# Altium PCB PCB1.PcbDoc (part 1 of 3)
Units mm, origin at the board's own origin, x right, y up, seen from the top; angles counter-clockwise.
Board outline 312.67 x 198.63 mm, 2 copper layers (Top Layer, Bottom Layer); 142 components, 324 nets, 969 pads, 386 vias.
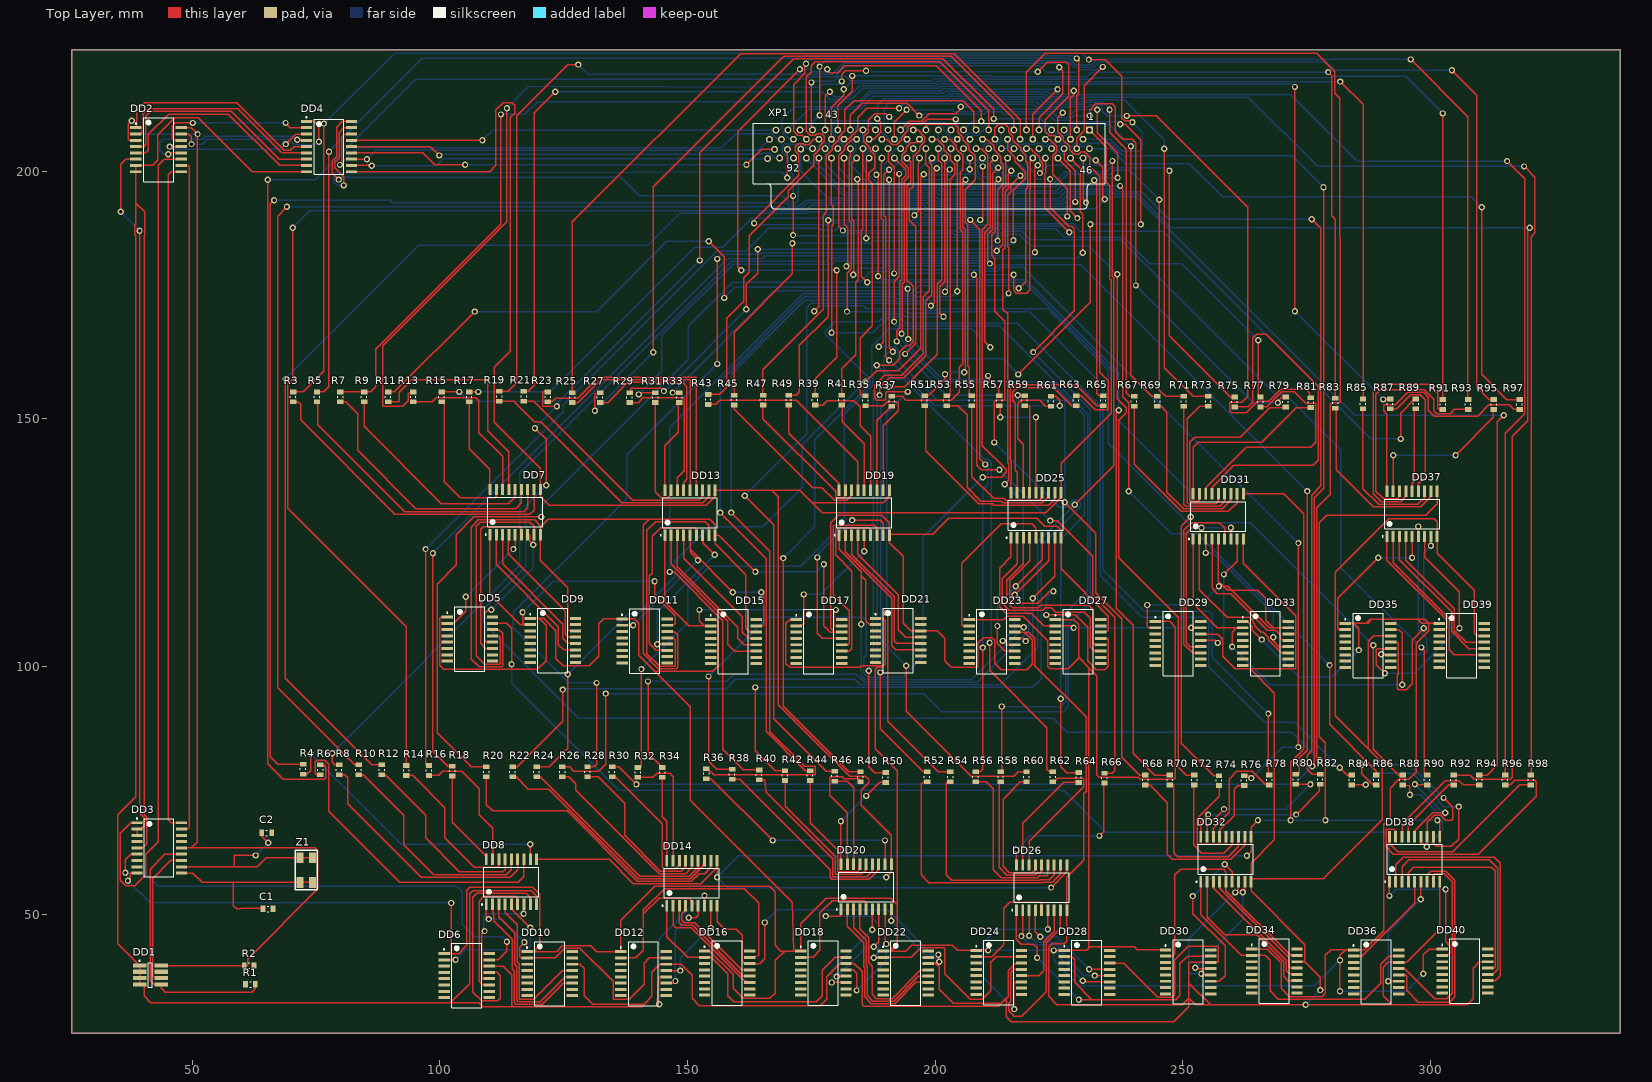
[diagram p0: Top Layer view]
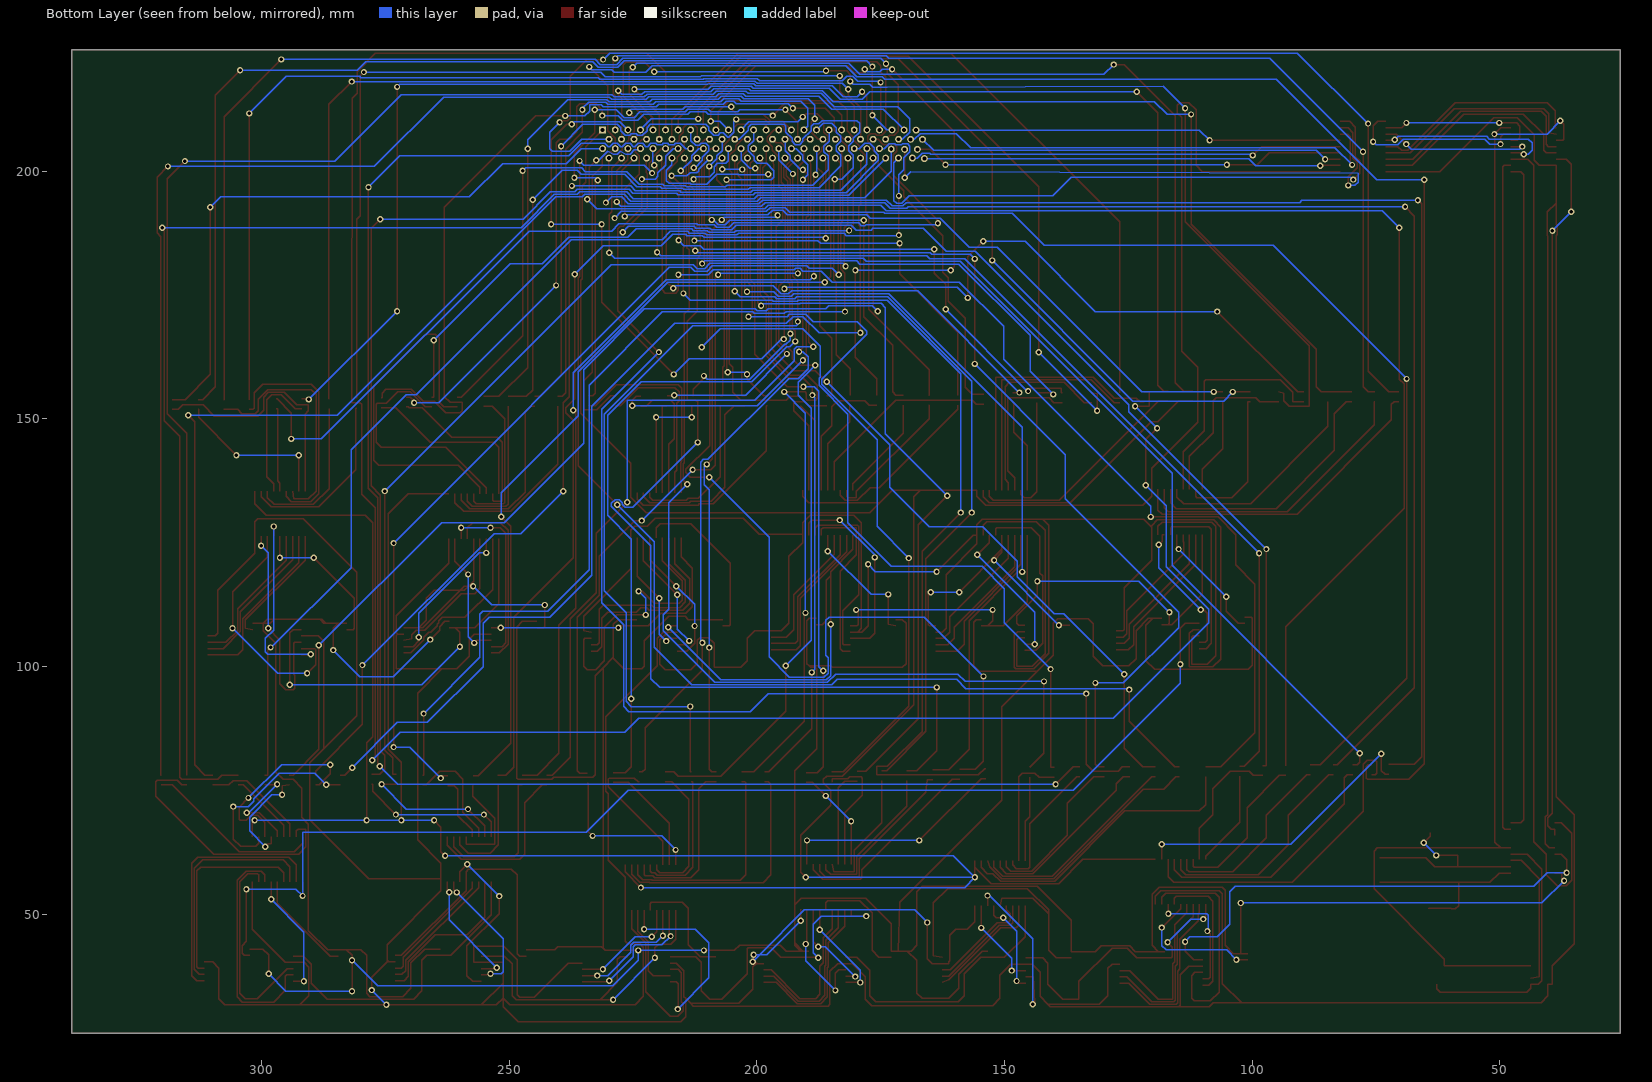
[diagram p1: Bottom Layer view, seen from below]

## Layer stack, top to bottom
Top Solder: solder mask 0.0102, Solder Resist, Dk 3.5
Top Layer: signal copper 0.0356
Dielectric 1: dielectric 0.32, FR-4, Dk 4.8
Bottom Layer: signal copper 0.0356
Bottom Solder: solder mask 0.0102, Solder Resist, Dk 3.5

## Board outline
25.654,25.908 25.654,224.536 338.328,224.536 338.328,25.908

## Design rules (kind name [scope] priority, off if disabled: settings)
Clearance [All] p1: gap=0.25
PolygonConnect [All] p1: connectstyle=Relief reliefconductorwidth=0.254 reliefentries=4 polygonreliefangle="90 Angle" airgapwidth=0.254
RoomDefinition Sheet1 [InComponentClass('Sheet1')] p1: confinementstyle=ConfineIn formatcopy=TRUE lockcomponents=FALSE outline 25.654,25.908 338.328,25.908 338.328,224.536 25.654,224.536
RoutingVias [All] p1: holewidth=0.711 width=1.27 viastyle="Through Hole" minholewidth=0.711 minwidth=1.27 maxholewidth=0.711 maxwidth=1.27
SolderMaskExpansion [All] p1: expansion=0.102
Width [All] p1: maxlimit=1 minlimit=0.254 preferedwidth=0.254
29 further rules are at their usual default settings.

## Components (designator, comment, footprint, x,y, rotation, side; value= is the part's Value field where it differs from the comment)
DD1 "24C512" 24C512 41.532,37.719 r0 top
DD2 "561KP2" 561KP2 43.18,204.343 r0 top
DD3 "PIC16F628" PIC16F628 43.31,63.373 r0 top
DD4 "TD62083" TD62083 77.597,204.978 r0 top
DD5 "561IR2" CD4015 106.042,105.537 r0 top
DD6 "561IR2" CD4015 105.413,37.592 r0 top
DD7 "TD62083" TD62083 115.186,131.191 r90 top
DD8 "TD62083" TD62083 114.43,56.515 r90 top
DD9 "561IR2" CD4015 122.806,105.283 r0 top
DD10 "561IR2" CD4015 122.177,37.973 r0 top
DD11 "561IR2" CD4015 141.348,105.156 r0 top
DD12 "561IR2" CD4015 141.1,37.973 r0 top
DD13 "TD62083" TD62083 150.492,131.064 r90 top
DD14 "TD62083" TD62083 150.879,56.261 r90 top
DD15 "561IR2" CD4015 159.255,105.029 r0 top
DD16 "561IR2" CD4015 157.991,38.1 r0 top
DD17 "561IR2" CD4015 176.527,105.029 r0 top
DD18 "561IR2" CD4015 177.422,38.1 r0 top
DD19 "TD62083" TD62083 185.671,131.064 r90 top
DD20 "TD62083" TD62083 186.058,55.499 r90 top
DD21 "561IR2" CD4015 192.529,105.283 r0 top
DD22 "561IR2" CD4015 194.059,38.1 r0 top
DD23 "561IR2" CD4015 211.452,105.029 r0 top
DD24 "561IR2" CD4015 212.855,38.227 r0 top
DD25 "TD62083" TD62083 220.342,130.556 r90 top
DD26 "TD62083" TD62083 221.491,55.372 r90 top
DD27 "561IR2" CD4015 228.851,105.029 r0 top
DD28 "561IR2" CD4015 230.635,38.227 r0 top
DD29 "561IR2" CD4015 249.044,104.648 r0 top
DD30 "561IR2" CD4015 251.082,38.354 r0 top
DD31 "TD62083" TD62083 257.172,130.302 r90 top
DD32 "TD62083" TD62083 258.702,61.087 r90 top
DD33 "561IR2" CD4015 266.697,104.648 r0 top
DD34 "561IR2" CD4015 268.481,38.481 r0 top
DD35 "561IR2" CD4015 287.398,104.267 r0 top
DD36 "561IR2" CD4015 289.055,38.354 r0 top
DD37 "TD62083" TD62083 296.288,130.81 r90 top
DD38 "TD62083" TD62083 296.802,61.087 r90 top
DD39 "561IR2" CD4015 306.321,104.267 r0 top
DD40 "561IR2" CD4015 306.962,38.481 r0 top
R1 "Resistor125" R_0805 61.725,35.814 r0 top
R2 "Resistor125" R_0805 61.471,39.624 r0 top
R3 "Resistor125" R_0805 70.355,154.448 r90 top
R4 "Resistor125" R_0805 72.393,79.264 r90 top
R5 "Resistor125" R_0805 75.181,154.448 r90 top
R6 "Resistor125" R_0805 75.838,79.137 r90 top
R7 "Resistor125" R_0805 79.88,154.448 r90 top
R8 "Resistor125" R_0805 79.632,79.137 r90 top
R9 "Resistor125" R_0805 84.706,154.448 r90 top
R10 "Resistor125" R_0805 83.569,79.137 r90 top
R11 "Resistor125" R_0805 89.532,154.448 r90 top
R12 "Resistor125" R_0805 88.268,79.137 r90 top
R13 "Resistor125" R_0805 94.612,154.448 r90 top
R14 "Resistor125" R_0805 93.221,79.01 r90 top
R15 "Resistor125" R_0805 100.327,154.448 r90 top
R16 "Resistor125" R_0805 97.793,79.01 r90 top
R17 "Resistor125" R_0805 105.915,154.448 r90 top
R18 "Resistor125" R_0805 102.492,78.883 r90 top
R19 "Resistor125" R_0805 112.011,154.559 r90 top
R20 "Resistor125" R_0805 109.366,78.74 r90 top
R21 "Resistor125" R_0805 116.964,154.559 r90 top
R22 "Resistor125" R_0805 114.684,78.74 r90 top
R23 "Resistor125" R_0805 121.79,154.432 r90 top
R24 "Resistor125" R_0805 119.51,78.74 r90 top
R25 "Resistor125" R_0805 126.743,154.305 r90 top
R26 "Resistor125" R_0805 124.717,78.74 r90 top
R27 "Resistor125" R_0805 132.331,154.305 r90 top
R28 "Resistor125" R_0805 129.797,78.74 r90 top
R29 "Resistor125" R_0805 138.3,154.305 r90 top
R30 "Resistor125" R_0805 134.75,78.74 r90 top
R31 "Resistor125" R_0805 143.507,154.305 r90 top
R32 "Resistor125" R_0805 139.957,78.613 r90 top
R33 "Resistor125" R_0805 148.333,154.305 r90 top
R34 "Resistor125" R_0805 144.91,78.613 r90 top
R35 "Resistor125" R_0805 185.925,153.67 r90 top
R36 "Resistor125" R_0805 153.816,78.359 r90 top
R37 "Resistor125" R_0805 191.259,153.543 r90 top
R38 "Resistor125" R_0805 159.007,78.232 r90 top
R39 "Resistor125" R_0805 175.765,153.797 r90 top
R40 "Resistor125" R_0805 164.468,78.105 r90 top
R41 "Resistor125" R_0805 181.099,153.797 r90 top
R42 "Resistor125" R_0805 169.675,77.978 r90 top
R43 "Resistor125" R_0805 154.175,153.924 r90 top
R44 "Resistor125" R_0805 174.755,77.978 r90 top
R45 "Resistor125" R_0805 159.398,153.797 r90 top
R46 "Resistor125" R_0805 179.708,77.851 r90 top
R47 "Resistor125" R_0805 165.24,153.797 r90 top
R48 "Resistor125" R_0805 184.915,77.724 r90 top
R49 "Resistor125" R_0805 170.431,153.797 r90 top
R50 "Resistor125" R_0805 189.995,77.597 r90 top
R51 "Resistor125" R_0805 197.863,153.67 r90 top
R52 "Resistor125" R_0805 198.377,77.724 r90 top
R53 "Resistor125" R_0805 202.308,153.67 r90 top
R54 "Resistor125" R_0805 203.076,77.724 r90 top
R55 "Resistor125" R_0805 207.388,153.67 r90 top
R56 "Resistor125" R_0805 208.156,77.724 r90 top
R57 "Resistor125" R_0805 212.976,153.67 r90 top
R58 "Resistor125" R_0805 213.236,77.724 r90 top
R59 "Resistor125" R_0805 218.056,153.67 r90 top
R60 "Resistor125" R_0805 218.443,77.724 r90 top
R61 "Resistor125" R_0805 223.39,153.543 r90 top
R62 "Resistor125" R_0805 223.777,77.724 r90 top
R63 "Resistor125" R_0805 228.47,153.67 r90 top
R64 "Resistor125" R_0805 228.984,77.597 r90 top
R65 "Resistor125" R_0805 233.931,153.67 r90 top
R66 "Resistor125" R_0805 234.191,77.47 r90 top
R67 "Resistor125" R_0805 240.154,153.543 r90 top
R68 "Resistor125" R_0805 242.446,77.089 r90 top
R69 "Resistor125" R_0805 244.853,153.543 r90 top
R70 "Resistor125" R_0805 247.399,77.089 r90 top
R71 "Resistor125" R_0805 250.187,153.543 r90 top
R72 "Resistor125" R_0805 252.352,77.089 r90 top
R73 "Resistor125" R_0805 255.14,153.543 r90 top
R74 "Resistor125" R_0805 257.305,76.962 r90 top
R75 "Resistor125" R_0805 260.474,153.416 r90 top
R76 "Resistor125" R_0805 262.385,76.962 r90 top
R77 "Resistor125" R_0805 265.681,153.416 r90 top
R78 "Resistor125" R_0805 267.465,77.089 r90 top
R79 "Resistor125" R_0805 270.761,153.416 r90 top
R80 "Resistor125" R_0805 272.799,77.216 r90 top
R81 "Resistor125" R_0805 275.841,153.289 r90 top
R82 "Resistor125" R_0805 277.752,77.216 r90 top
R83 "Resistor125" R_0805 280.81,153.162 r90 top
R84 "Resistor125" R_0805 284.118,77.089 r90 top
R85 "Resistor125" R_0805 286.382,153.035 r90 top
R86 "Resistor125" R_0805 289.055,77.089 r90 top
R87 "Resistor125" R_0805 291.843,153.035 r90 top
R88 "Resistor125" R_0805 294.389,77.089 r90 top
R89 "Resistor125" R_0805 297.05,153.035 r90 top
R90 "Resistor125" R_0805 299.342,77.089 r90 top
R91 "Resistor125" R_0805 302.511,152.908 r90 top
R92 "Resistor125" R_0805 304.676,77.089 r90 top
R93 "Resistor125" R_0805 307.591,152.908 r90 top
R94 "Resistor125" R_0805 309.883,77.089 r90 top
R95 "Resistor125" R_0805 312.798,152.908 r90 top
R96 "Resistor125" R_0805 315.09,77.089 r90 top
R97 "Resistor125" R_0805 318.005,152.908 r90 top
R98 "Resistor125" R_0805 320.297,77.089 r90 top
XP1 "Contact" CONNECTOR 199.898,203.962 r180 top
Z1 "Resonator" Z_SMD 71.758,56.388 r90 top
С1 "Capacitor" C_0805 65.281,51.054 r0 top
С2 "Capacitor" C_0805 65.027,66.421 r0 top

## Footprints (in the part's own frame and the unit in brackets; to place one, negate y for a bottom-side part, rotate by r counter-clockwise, add the part's x,y. Pads: shape width x height; smd on the part's side, far side on the other; paste and mask are expansions set on the pad)
24C512 [mm] "SOIC, 8-Leads, Body 4,90x3,90mm, Pitch 1,27mm, IPC Medium Density"
  rect 2.7x0.85 smd: 1(-2.175,1.905) 2(-2.175,0.635) 3(-2.175,-0.635) 4(-2.175,-1.905) 5(2.175,-1.905) 6(2.175,-0.635) 7(2.175,0.635) 8(2.175,1.905)
  silkscreen extent -2.3,-2.5 0.42,3, body extent -2,-2.5 2,2.5, height 1.75
561KP2 [mm] "SOIC, 16-Leads, Body 12,80x7,50mm, Pitch 1,27mm, IPC Medium Density"
  rect 2.3x0.6 smd: 1(-4.575,4.445) 2(-4.575,3.175) 3(-4.575,1.905) 4(-4.575,0.635) 5(-4.575,-0.635) 6(-4.575,-1.905) 7(-4.575,-3.175) 8(-4.575,-4.445) 9(4.575,-4.445) 10(4.575,-3.175) 11(4.575,-1.905) 12(4.575,-0.635) 13(4.575,0.635) 14(4.575,1.905) 15(4.575,3.175) 16(4.575,4.445)
  silkscreen extent -4.7,-6.5 3.02,6.5, body extent -3.8,-6.5 3.8,6.5, height 2.65
C_0805 [mm] "Chip Resistor, 2-Leads, Body 2,00x1,25mm, IPC Medium Density"
  rect 0.95x1.3 smd: 1(-1,0) 2(1,0)
  silkscreen extent -0.15,-0.55 0.15,0.55, body extent -1,-0.63 1,0.63, height 0.6
CD4015 [mm] "SOIC, 16-Leads, Body 12,80x7,50mm, Pitch 1,27mm, IPC Medium Density"
  rect 2.3x0.6 smd: 1(-4.575,4.445) 2(-4.575,3.175) 3(-4.575,1.905) 4(-4.575,0.635) 5(-4.575,-0.635) 6(-4.575,-1.905) 7(-4.575,-3.175) 8(-4.575,-4.445) 9(4.575,-4.445) 10(4.575,-3.175) 11(4.575,-1.905) 12(4.575,-0.635) 13(4.575,0.635) 14(4.575,1.905) 15(4.575,3.175) 16(4.575,4.445)
  silkscreen extent -4.7,-6.5 3.02,6.5, body extent -3.8,-6.5 3.8,6.5, height 2.65
CONNECTOR [mm]
  rect 1.4x1.4 hole 0.8: 1(-31.229,-4.405)
  round 1.4 hole 0.8: 2(-29.959,-2.5) 3(-28.689,-4.405) 4(-27.419,-2.5) 5(-26.149,-4.405) 6(-24.879,-2.5) 7(-23.609,-4.405) 8(-22.339,-2.5) 9(-21.069,-4.405) 10(-19.799,-2.5) 11(-18.529,-4.405) 12(-17.259,-2.5) 13(-15.989,-4.405) 14(-14.719,-2.5) 15(-13.449,-4.405) 16(-12.179,-2.5) 17(-10.909,-4.405) 18(-9.639,-2.5) 19(-8.369,-4.405) 20(-7.099,-2.5) 21(-5.829,-4.405) 22(-4.559,-2.5) 23(-3.289,-4.405) 24(-2.019,-2.5) 25(-0.749,-4.405) 26(0.521,-2.5) 27(1.791,-4.405) 28(3.061,-2.5) 29(4.331,-4.405) 30(5.601,-2.5) 31(6.871,-4.405) 32(8.141,-2.5) 33(9.411,-4.405) 34(10.681,-2.5) 35(11.951,-4.405) 36(13.221,-2.5) 37(14.491,-4.405) 38(15.761,-2.5) 39(17.031,-4.405) 40(18.301,-2.5) 41(19.571,-4.405) 42(20.841,-2.5) 43(22.111,-4.405) 44(23.381,-2.5) 45(24.651,-4.405) 46(25.921,-2.5) 47(27.191,-4.405) 47(27.191,-4.405) 49(-31.229,-0.595) 50(-29.959,1.31) 51(-28.689,-0.595) 52(-27.419,1.31) 53(-26.149,-0.595) 54(-24.879,1.31) 55(-23.609,-0.595) 56(-22.339,1.31) 57(-21.069,-0.595) 58(-19.799,1.31) 59(-18.529,-0.595) 60(-17.259,1.31) 61(-15.989,-0.595) 62(-14.719,1.31) 63(-13.449,-0.595) 64(-12.179,1.31) 65(-10.909,-0.595) 66(-9.639,1.31) 67(-8.369,-0.595) 68(-7.099,1.31) 69(-5.829,-0.595) 70(-4.559,1.31) 71(-3.289,-0.595) 72(-2.019,1.31) 73(-0.749,-0.595) 74(0.521,1.31) 75(1.791,-0.595) 76(3.061,1.31) 77(4.331,-0.595) 78(5.601,1.31) 79(6.871,-0.595) 80(8.141,1.31) 81(9.411,-0.595) 82(10.681,1.31) 83(11.951,-0.595) 84(13.221,1.31) 85(14.491,-0.595) 86(15.761,1.31) 87(17.031,-0.595) 88(18.301,1.31) 89(19.571,-0.595) 90(20.841,1.31) 91(22.111,-0.595) 92(23.381,1.31) 93(24.651,-0.595) 94(25.921,1.31) 95(27.041,-0.5) 96(28.541,-2.5) 97(29.642,-4.369) 98(28.499,1.295) 99(29.743,-0.457) 100(30.963,-2.489) 101(32.055,-4.343) 102(31.293,1.295) 103(32.309,-0.457) 104(33.35,-2.489) 105(33.731,1.397)
  silkscreen extent -34.39,-5.7 36.61,11.53
PIC16F628 [mm] "SOIC, 18-Leads, Body 11,58x7,50mm, Pitch 1,27mm, IPC Medium Density"
  rect 2.2x0.6 smd: 1(-4.475,5.08) 2(-4.475,3.81) 3(-4.475,2.54) 4(-4.475,1.27) 5(-4.475,0) 6(-4.475,-1.27) 7(-4.475,-2.54) 8(-4.475,-3.81) 9(-4.475,-5.08) 10(4.475,-5.08) 11(4.475,-3.81) 12(4.475,-2.54) 13(4.475,-1.27) 14(4.475,0) 15(4.475,1.27) 16(4.475,2.54) 17(4.475,3.81) 18(4.475,5.08)
  silkscreen extent -4.6,-5.85 2.98,6.05, body extent -3.8,-5.85 3.8,5.85, height 2.65
R_0805 [mm] "Chip Resistor, 2-Leads, Body 2,00x1,25mm, IPC Medium Density"
  rect 0.95x1.3 smd: 1(-1,0) 2(1,0)
  silkscreen extent -0.15,-0.55 0.15,0.55, body extent -1,-0.63 1,0.63, height 0.6
TD62083 [mm] "SOP, 18-Leads, Body 10,80x7,50mm, Pitch 1,27mm, IPC Medium Density"
  rect 2.3x0.6 smd: 1(-4.55,5.08) 2(-4.55,3.81) 3(-4.55,2.54) 4(-4.55,1.27) 5(-4.55,0) 6(-4.55,-1.27) 7(-4.55,-2.54) 8(-4.55,-3.81) 9(-4.55,-5.08) 10(4.55,-5.08) 11(4.55,-3.81) 12(4.55,-2.54) 13(4.55,-1.27) 14(4.55,0) 15(4.55,1.27) 16(4.55,2.54) 17(4.55,3.81) 18(4.55,5.08)
  silkscreen extent -4.67,-5.55 3,6.05, body extent -3.8,-5.55 3.8,5.55, height 2.29
Z_SMD [mm]
  rect 2.2x1.4 smd: 3(0,0) 4(5,0) 5(0,-2.5) 6(5,-2.5)
  silkscreen extent -1.5,-3.5 6.5,1

## Part data
DD1: "EEPROM/24C512-SMD"
DD2: "Мультиплексор/Аналог 4051М smd"
DD3: "Микроконтроллер"
DD4 DD7 DD8 DD13 DD14 DD19 DD20 DD25 DD26 DD31 DD32 DD37 DD38: "Darlington Sink Driver"
DD5 DD6 DD9 DD10 DD11 DD12 DD15 DD16 DD17 DD18 DD21 DD22 DD23 DD24 DD27 DD28 DD29 DD30 DD33 DD34 DD35 DD36 DD39 DD40: "Регистр сдвига"
R1 R2 R3 R4 R5 R6 R7 R8 R9 R10 R11 R12 R13 R14 R15 R16 R17 R18 R19 R20 R21 R22 R23 R24 R25 R26 R27 R28 R29 R30 R31 R32 R33 R34 R35 R36 R37 R38 R39 R40 R41 R42 R43 R44 R45 R46 R47 R48 R49 R50 R51 R52 R53 R54 R55 R56 R57 R58 R59 R60 R61 R62 R63 R64 R65 R66 R67 R68 R69 R70 R71 R72 R73 R74 R75 R76 R77 R78 R79 R80 R81 R82 R83 R84 R85 R86 R87 R88 R89 R90 R91 R92 R93 R94 R95 R96 R97 R98: "Резистор 0.125Вт"
Z1: "Резонатор/КХ-13"
С1 С2: "Конденсатор"

## Via types
v1: diameter 1.27, hole 0.711, Top Layer to Bottom Layer, 386 vias

## Nets (pads, with @x,y where several pads share a name; then routed paths per layer and width w, separated by ;. In a path a pad name is that pad's centre, name@x,y a point inside that pad or via, vN(x,y) a via of type N, cw(c..) or ccw(c..) an arc to the next point about the centre after c; other vN are vias at no path point)
"+5 В": DD1.8 DD2.3 DD2.16 DD3.14 R2.1 | length 242.8
  Top Layer w0.254: v1(37.77,210.185) 37.059,209.474 37.059,206.502 37.313,206.248 DD2.3@38.605,206.248 ; DD1.8@43.707,39.624 R2.1@60.471,39.624 61.163,39.624 61.163,40.919 75.336,55.093 75.336,62.738 74.701,63.373 49.784,63.373 ; DD2.16@47.755,208.788 49.784,208.788 v1@50.952,207.62 ; DD3.14@47.785,63.373 49.784,63.373 ; v1(51.054,207.518) v1@50.952,207.62 ; 49.784,63.373 50.952,64.541 v1@50.952,207.62
  Bottom Layer w0.254: v1(37.77,210.185) 40.437,207.518 v1(51.054,207.518)
C1: 
C2: 
GND: DD1.1 DD1.2 DD1.3 DD1.4 DD2.7 DD2.8 DD3.5 DD4.9 DD5.14 DD6.14 DD7.9 DD8.9 DD9.14 DD10.14 DD11.14 DD12.14 DD13.9 DD14.9 DD15.14 DD16.14 DD17.14 DD18.14 DD19.9 DD20.9 DD21.14 DD22.14 DD23.14 DD24.14 DD25.9 DD26.9 DD27.14 DD28.14 DD29.14 DD30.14 DD31.9 DD32.9 DD33.14 DD34.14 DD35.14 DD36.14 DD37.9 DD38.9 DD39.14 DD40.14 | length 1787.9
  Top Layer w0.254: DD3.5@38.835,63.373 39.954,63.373 40.816,64.235 40.816,69.634 40.335,70.115 40.335,186.97 40.357,186.991 40.357,191.799 38.583,193.573 ; DD4.9@73.047,199.898 62.129,199.898 51.239,210.788 46.424,210.788 43.002,207.366 43.002,202.184 41.986,201.168 DD2.7@38.605,201.168 DD2.8@38.605,199.898 38.583,199.898 38.583,193.573 ; DD6.14@109.988,39.497 112.776,39.497 114.54,37.733 114.54,31.594 114.808,31.326 140.724,31.326 ; DD5.14@110.617,107.442 111.912,107.442 112.674,106.68 112.674,99.911 107.912,99.911 106.324,101.498 106.324,128.137 107.778,129.591 119.098,129.591 120.266,128.422 120.266,128.115 ; DD8.9@119.51,51.965 119.51,53.619 118.413,54.717 106.583,54.717 105.969,54.102 105.969,35.966 102.108,32.106 ; DD10.14@126.752,39.878 128.27,39.878 129.108,39.04 129.108,33.528 130.81,31.826 141.224,31.826 ; DD9.14@127.381,107.188 126.086,107.188 125.832,107.442 125.832,115.897 120.266,121.463 DD7.9@120.266,126.641 120.266,128.115 ; DD11.14@145.923,107.061 147.32,107.061 147.976,106.405 147.976,99.822 147.684,99.53 144.12,99.53 141.021,102.629 141.021,128.549 142.24,129.769 ; DD14.9@155.959,51.711 155.959,48.511 157.48,46.99 159.817,46.99 161.039,45.768 161.039,40.589 161.265,40.364 161.265,40.005 DD16.14@162.566,40.005 164.592,40.005 165.608,41.021 v1(165.608,48.311) ; v1(163.703,119.151) 156.34,126.514 DD13.9@155.572,126.514 ; DD15.14@163.83,106.934 162.535,106.934 161.773,107.696 161.773,118.556 155.572,124.757 DD13.9@155.572,126.514 ; v1(177.546,120.625) 177.546,108.204 178.816,106.934 179.654,106.934 ; DD17.14@181.102,106.934 179.654,106.934 ; v1(191.138,48.666) DD20.9@191.138,50.949 ; v1(200.66,41.808) 200.66,40.767 200.025,40.132 ; v1(200.825,40.399) 200.025,40.132 ; DD23.14@216.027,106.934 218.008,106.934 ; DD24.14@217.43,40.132 216.23,40.132 214.706,38.608 214.706,33.35 214.351,32.995 ; DD27.14@233.426,106.934 234.975,107.188 234.975,110.16 225.422,119.713 DD25.9@225.422,126.006 225.422,127.508 224.621,128.309 222.11,128.309 220.472,129.946 202.717,129.946 199.517,126.746 DD19.9@190.751,126.746 ; DD28.14@235.21,40.132 238.083,40.132 244.983,33.232 247.862,33.232 248.361,33.731 248.361,40.745 251.093,43.476 257.184,43.476 257.184,40.259 DD30.14@255.657,40.259 251.43,40.259 251.235,40.065 251.235,36.064 ; DD29.14@253.619,106.553 257.048,106.553 258.064,105.537 258.064,102.032 260.579,99.517 263.627,99.517 ; DD31.9@262.252,125.752 262.252,120.805 272.821,110.236 272.821,106.832 272.542,106.553 ; DD33.14@271.272,106.553 272.542,106.553 ; DD34.14@273.056,40.386 274.345,40.386 ; v1(277.774,34.671) 277.774,37.211 274.599,40.386 274.345,40.386 ; DD35.14@291.973,106.172 288.544,106.172 287.426,105.054 287.426,83.363 ; DD38.9@301.882,56.537 301.882,46.968 295.173,40.259 DD36.14@293.63,40.259 291.363,40.259 290.428,39.323 290.428,33.524 292.278,31.674 ; DD39.14@310.896,106.172 309.372,106.172 308.864,106.68 308.864,115.351 301.368,122.847 DD37.9@301.368,126.26 301.368,129.213 300.736,129.845 291.592,129.845 280.772,119.024 280.772,90.018 287.426,83.363 ; DD40.14@311.537,40.386 309.88,40.386 308.61,39.116 308.61,32.868 307.416,31.674 292.278,31.674 ; 38.583,193.573 38.583,189.268 38.329,189.015 38.329,187.27 38.608,186.991 38.608,73.711 34.984,70.087 34.984,43.985 39.345,39.624 DD1.1@39.357,39.624 DD1.2@39.357,38.354 DD1.3@39.357,37.084 DD1.4@39.357,35.814 40.284,35.814 40.284,33.477 41.656,32.106 102.108,32.106 ; 102.108,32.106 107.817,32.106 108.605,31.318 140.716,31.318 140.724,31.326 ; 120.266,128.115 121.92,129.769 142.24,129.769 ; 140.724,31.326 141.224,31.826 ; 141.224,31.826 142.773,33.376 142.773,38.252 144.399,39.878 DD12.14@145.675,39.878 148.692,39.878 150.901,37.668 150.901,33.045 152.4,31.547 176.784,31.547 178.079,32.842 178.079,37.389 180.696,40.005 DD18.14@181.997,40.005 183.672,40.005 185.246,38.431 185.246,31.759 185.557,31.448 212.804,31.448 213.36,32.004 ; 142.24,129.769 154.432,129.769 155.572,128.629 DD13.9@155.572,126.514 ; 179.654,106.934 178.892,107.696 178.892,129.032 180.438,130.577 189.206,130.577 190.751,129.032 DD19.9@190.751,126.746 ; DD19.9@190.751,126.746 DD19.9@190.751,126.514 190.751,125.019 193.523,122.247 193.523,108.712 195.047,107.188 DD21.14@197.104,107.188 200.457,107.188 201.981,105.664 201.981,101.117 203.2,99.898 208.585,99.898 208.614,99.928 208.614,104.648 209.817,105.851 211.446,105.851 211.988,105.309 211.988,100.686 213.36,99.314 218.44,99.314 219.583,100.457 219.583,105.359 218.008,106.934 ; 200.025,40.132 200.825,39.332 200.825,34.861 203.683,32.004 213.36,32.004 ; 200.025,40.132 199.898,40.005 DD22.14@198.634,40.005 200.025,40.132 ; 213.36,32.004 214.351,32.995 ; 214.351,32.995 214.351,29.261 215.392,28.219 248.158,28.219 251.235,31.297 251.235,33.003 ; 218.008,106.934 218.872,106.934 220.142,105.664 220.142,100.203 230.515,89.83 230.515,74.791 230.022,74.298 230.022,60.881 226.571,57.429 DD26.9@226.571,50.822 226.571,44.504 226.06,43.993 223.545,43.993 222.914,43.362 222.914,33.372 224.583,31.703 249.936,31.703 251.235,33.003 ; 251.235,33.003 251.235,33.016 ; 251.235,33.016 251.235,36.064 ; 251.235,33.016 252.578,31.674 255.626,31.674 ; 251.235,36.064 255.626,31.674 ; 255.626,31.674 v1(274.777,31.674) 292.278,31.674 ; 263.627,99.517 272.821,99.517 272.821,106.274 272.542,106.553 ; 263.627,99.517 268.503,94.64 268.503,65.024 263.782,60.303 DD32.9@263.782,57.175 ; DD32.9@263.782,57.175 278.308,57.175 290.22,69.088 290.22,80.569 287.426,83.363 ; DD32.9@263.782,57.175 DD32.9@263.782,56.537 263.782,54.683 274.599,43.866 274.599,40.64 274.345,40.386
  Bottom Layer w0.254: v1(163.703,119.151) 176.073,119.151 v1(177.546,120.625) ; v1(165.608,48.311) 168.148,50.851 190.373,50.851 199.415,41.808 ; v1(191.138,48.666) 197.996,41.808 199.415,41.808 ; v1(200.66,41.808) 199.415,41.808 ; v1(200.825,40.399) 199.415,41.808 ; v1(274.777,31.674) v1(277.774,34.671)
NetDD1_5: DD1.5 DD3.13 R1.2 | length 54
  Top Layer w0.254: DD3.13@47.785,62.103 44.475,62.103 41.476,59.104 41.476,36.553 42.215,35.814 DD1.5@43.707,35.814 43.707,35.052 44.571,34.188 61.976,34.188 62.725,34.937 R1.2@62.725,35.814
NetDD1_6: DD1.6 DD3.12 | length 28.9
  Top Layer w0.254: DD1.6@43.707,37.084 41.98,37.338 41.98,57.169 45.644,60.833 DD3.12@47.785,60.833
NetDD2_1: DD2.1 DD4.5 | length 42.8
  Top Layer w0.254: DD2.1@38.605,208.788 38.786,208.788 38.786,212.217 40.386,213.817 58.979,213.817 68.58,204.216 69.825,204.216 70.587,204.978 DD4.5@73.047,204.978
NetDD2_2: DD2.2 DD4.6 | length 42.5
  Top Layer w0.254: DD2.2@38.605,207.518 40.132,207.772 40.132,211.658 41.123,212.649 59.131,212.649 68.072,203.708 DD4.6@73.047,203.708
NetDD2_4: DD2.4 DD4.7 | length 44.7
  Top Layer w0.254: DD2.4@38.605,204.978 40.157,204.978 40.636,205.457 40.636,211.07 41.656,212.09 57.87,212.09 67.522,202.438 DD4.7@73.047,202.438
NetDD2_5: DD2.5 DD4.8 | length 43.9
  Top Layer w0.254: DD2.5@38.605,203.708 40.589,203.708 41.14,204.259 41.14,207.485 45.212,211.557 57.253,211.557 67.642,201.168 DD4.8@73.047,201.168
NetDD2_6: DD2.6 DD3.2 DD3.3 | length 142
  Top Layer w0.254: v1(35.535,191.821) 35.535,201.397 36.576,202.438 DD2.6@38.605,202.438 ; DD3.3@38.835,65.913 DD3.2@38.835,67.183 39.624,67.183 40.312,67.871 40.312,69.418 39.345,70.386 v1(39.345,188.011)
  Bottom Layer w0.254: v1(35.535,191.821) v1(39.345,188.011)
NetDD2_9: DD2.9 DD3.18 | length 136
  Top Layer w0.254: DD2.9@47.755,199.898 45.72,199.898 45.161,199.339 45.161,69.012 45.72,68.453 DD3.18@47.785,68.453
NetDD2_10: DD2.10 DD3.17 | length 136.8
  Top Layer w0.254: DD2.10@47.755,201.168 49.124,201.168 49.378,200.914 49.378,67.539 49.022,67.183 DD3.17@47.785,67.183
NetDD2_11: DD2.11 DD3.1 | length 169.7
  Top Layer w0.254: DD3.1@38.835,68.453 37.592,68.453 35.488,66.349 35.488,56.794 36.576,55.706 38.358,55.706 40.64,57.988 40.64,62.103 43.155,64.618 43.155,201.219 44.374,202.438 DD2.11@47.755,202.438
NetDD2_12: DD2.12 DD4.4 | length 36.7
  Top Layer w0.254: v1(45.136,203.454) 45.39,203.708 DD2.12@47.755,203.708 ; v1(71.171,206.35) 71.272,206.248 DD4.4@73.047,206.248
  Bottom Layer w0.254: v1(45.136,203.454) 44.196,203.454 43.434,204.216 43.434,205.742 44.196,206.504 52.062,206.504 52.593,207.035 70.485,207.035 v1(71.171,206.35)
NetDD2_13: DD2.13 DD4.3 | length 31.4
  Top Layer w0.254: v1(45.458,204.978) DD2.13@47.755,204.978 ; v1(68.845,205.486) 70.877,207.518 DD4.3@73.047,207.518
  Bottom Layer w0.254: v1(45.458,204.978) 45.962,204.474 67.833,204.474 v1(68.845,205.486)
NetDD2_14: DD2.14 DD4.2 | length 32.1
  Top Layer w0.254: DD2.14@47.755,206.248 46.457,206.248 45.949,206.756 45.949,209.118 46.584,209.753 v1(50.089,209.753) ; v1(68.834,209.753) 69.799,208.788 DD4.2@73.047,208.788
  Bottom Layer w0.254: v1(50.089,209.753) v1(68.834,209.753)
NetDD2_15: DD2.15 DD4.1 | length 36.8
  Top Layer w0.254: DD2.15@47.755,207.518 49.276,207.518 49.835,206.959 v1(49.835,205.486) ; DD4.1@73.047,210.058 74.651,210.058 75.565,209.144 v1(75.565,205.938)
  Bottom Layer w0.254: v1(49.835,205.486) 52.052,205.486 53.064,206.498 69.435,206.498 70.612,205.321 74.948,205.321 v1(75.565,205.938)
NetDD3_6: DD3.6 DD6.15 | length 98.3
  Top Layer w0.254: v1(36.5,58.369) 36.5,61.011 37.592,62.103 DD3.6@38.835,62.103 ; DD6.15@109.988,40.767 111.76,40.767 113.538,42.545 v1(113.538,44.425)
  Bottom Layer w0.254: v1(36.5,58.369) 40.437,58.369 43.129,55.677 103.378,55.677 104.521,54.534 104.521,47.93 107.036,45.415 112.547,45.415 v1(113.538,44.425)
NetDD3_9: DD3.9 DD5.1 DD6.1 DD9.1 DD10.1 DD11.1 DD12.1 DD15.1 DD16.1 DD17.1 DD18.1 DD21.1 DD22.1 DD23.1 DD24.1 DD27.1 DD28.1 DD29.1 DD30.1 DD33.1 DD34.1 DD35.1 DD36.1 DD39.1 DD40.1 | length 1051.9
  Top Layer w0.254: v1(37.008,56.718) 37.008,56.858 37.516,57.366 37.516,58.191 37.617,58.293 DD3.9@38.835,58.293 ; DD6.1@100.838,42.037 102.26,42.037 ; DD5.1@101.467,109.982 100.178,109.982 99.924,109.728 99.924,100.279 100.796,99.407 119.676,99.407 121.437,101.168 121.437,108.306 120.015,109.728 ; v1(102.26,52.248) 102.26,42.037 ; DD10.1@117.602,42.418 118.923,42.418 ; DD9.1@118.231,109.728 120.015,109.728 ; DD16.1@153.416,42.545 154.524,42.545 159.198,37.871 159.198,34.985 161.214,32.969 166.624,32.969 167.716,34.061 167.716,40.64 169.621,42.545 ; DD15.1@154.68,109.474 155.703,109.474 156.21,108.967 156.21,100.127 155.109,99.026 143.392,99.026 ; DD17.1@171.952,109.474 170.612,109.474 169.85,108.712 169.85,100.584 170.612,99.822 184.768,99.822 185.094,100.148 189.455,100.148 ; DD21.1@187.954,109.728 189.382,109.728 189.89,109.22 189.89,100.584 189.455,100.148 ; DD22.1@189.484,42.545 190.678,42.545 ; DD23.1@206.877,109.474 213.801,109.474 214.478,110.151 217.763,110.151 222.682,105.232 222.682,100.076 223.215,99.543 226.847,99.543 229.07,101.765 ; v1(210.67,42.672) DD24.1@208.28,42.672 204.534,42.672 203.479,43.726 195.237,43.726 194.056,42.545 191.176,42.545 ; v1(223.926,42.672) DD28.1@226.06,42.672 230.632,42.672 231.038,43.078 ; DD27.1@224.276,109.474 227.965,109.474 228.952,108.488 228.952,101.883 229.07,101.765 ; DD29.1@244.469,109.093 247.32,109.093 248.463,107.95 248.463,77.47 248.209,77.216 241.427,77.216 241.046,77.597 233.172,77.597 232.664,78.105 232.664,98.171 231.038,99.797 ; DD30.1@246.507,42.799 240.843,42.799 240.182,43.459 231.419,43.459 231.038,43.078 ; DD33.1@262.122,109.093 262.966,109.093 264.02,108.039 264.02,107.348 v1(265.933,105.435) ; DD34.1@263.906,42.926 267.066,42.926 269.828,40.163 269.828,35.057 271.526,33.359 278.113,33.359 278.79,34.036 278.79,41.656 279.933,42.799 282.88,42.799 ; v1(281.737,34.442) v1(281.737,40.671) 281.737,41.656 282.88,42.799 ; DD35.1@282.823,108.712 284.531,108.712 ; v1(285.547,103.327) 285.547,107.696 284.531,108.712 ; v1(298.577,37.948) 298.577,41.783 299.72,42.926 DD40.1@302.387,42.926 ; DD39.1@301.746,108.712 299.669,108.712 ; 102.26,42.037 103.759,42.037 105.41,43.688 105.41,54.864 106.006,55.46 118.748,55.46 120.193,54.015 120.193,43.688 118.923,42.418 ; 118.923,42.418 123.54,42.418 124.721,43.599 130.467,43.599 131.648,42.418 DD12.1@136.525,42.418 136.525,48.798 143.38,55.654 166.624,55.654 167.716,54.562 167.716,43.688 168.859,42.545 169.621,42.545 ; 120.015,109.728 120.955,109.728 123.419,107.264 123.419,101.6 124.866,100.152 130.175,100.152 132.08,102.057 132.08,108.585 133.096,109.601 DD11.1@136.773,109.601 139.268,109.601 140.157,108.712 140.157,102.26 143.392,99.026 ; 143.392,99.026 150.546,91.872 150.546,73 171.145,52.4 171.45,42.545 ; 169.621,42.545 171.45,42.545 ; 171.45,42.545 DD18.1@172.847,42.545 172.847,48.087 178.003,53.242 191.008,53.242 192.319,51.931 ; 189.455,100.148 189.128,99.822 188.222,99.822 187.884,99.484 187.884,83.388 192.319,78.953 192.319,51.931 ; 190.678,42.545 191.176,42.545 ; 190.678,42.545 192.319,44.186 ; 191.176,42.545 192.319,43.688 192.319,44.186 ; 192.319,44.186 192.319,51.931 ; 229.07,101.765 231.038,99.797 ; 231.038,43.078 231.038,99.797 ; 282.88,42.799 DD36.1@284.48,42.799 286.664,42.799 290.525,46.66 290.525,68.174 291.897,69.545 291.897,75.463 293.624,77.191 295.656,77.191 297.155,78.689 297.155,104.673 299.669,107.188 299.669,108.712 ; 284.531,108.712 287.02,108.712 ; 287.02,108.712 287.401,108.712 288.188,109.499 ; 287.02,108.712 287.807,109.499 288.188,109.499 ; 288.188,109.499 297.447,109.499 ; 297.447,109.499 298.882,109.499 299.669,108.712 ; 297.447,109.499 298.234,108.712 299.669,108.712
  Bottom Layer w0.254: v1(37.008,56.718) 41.478,52.248 v1(102.26,52.248) ; v1(210.67,42.672) v1(223.926,42.672) 223.926,40.691 229.108,35.509 276.575,35.509 v1(281.737,40.671) ; v1(265.933,105.435) 273.426,97.942 280.162,97.942 v1(285.547,103.327) ; v1(281.737,34.442) 295.072,34.442 v1(298.577,37.948)
NetDD3_15: DD3.15
NetDD3_16: DD3.16
NetDD5_2: DD5.2 DD7.5 | length 24.4
  Top Layer w0.254: DD5.2@101.467,108.712 102.743,108.712 105.207,111.176 v1(105.207,114.097) ; v1(114.833,123.723) 115.186,124.076 DD7.5@115.186,126.641
  Bottom Layer w0.254: v1(105.207,114.097) v1(114.833,123.723)
NetDD5_11: DD5.11 DD7.6 | length 35.7
  Top Layer w0.254: DD5.11@110.617,103.632 109.296,103.632 108.28,104.648 108.28,127.762 108.712,128.194 116.304,128.194 116.456,128.041 DD7.6@116.456,126.641
NetDD5_12: DD5.12 DD7.7 | length 28.2
  Top Layer w0.254: v1(110.338,111.455) 109.728,111.455 109.068,110.795 109.068,105.258 109.423,104.902 DD5.12@110.617,104.902 ; DD7.7@117.726,126.641 118.135,126.641 118.135,125.298 v1(118.847,124.587)
  Bottom Layer w0.254: v1(110.338,111.455) 118.847,119.964 v1(118.847,124.587)
NetDD5_13: DD5.13 DD7.8 | length 52.8
  Top Layer w0.254: DD5.13@110.617,106.172 111.912,106.172 112.166,105.918 112.166,100.415 109.093,100.415 107.315,102.193 107.315,128.27 108.128,129.083 118.183,129.083 118.996,128.27 DD7.8@118.996,126.641
NetDD5_15: DD5.15 DD38.1 DD40.2 | length 247.7
  Top Layer w0.254: DD5.15@110.617,108.712 113.487,108.712 114.452,107.747 v1(114.452,100.482) ; v1(291.722,53.67) DD38.1@291.722,56.537 ; DD40.2@302.387,41.656 303.505,41.656 303.914,42.065 303.914,43.612 303.047,44.478 v1(303.047,55.016)
  Bottom Layer w0.254: v1(114.452,100.482) 114.452,96.622 136.093,74.981 226.009,74.981 234.442,66.548 291.722,66.548 v1(291.722,53.67) 293.068,55.016 v1(303.047,55.016)
NetDD6_2: DD6.2 DD8.5 | length 28.5
  Top Layer w0.254: DD6.2@100.838,40.767 v1(103.149,40.767) ; DD8.5@114.43,51.965 114.43,51.105 v1(118.237,47.298)
  Bottom Layer w0.254: v1(103.149,40.767) 105.156,42.774 117.348,42.774 118.237,43.663 v1(118.237,47.298)
NetDD6_11: DD6.11 DD8.6 | length 28.1
  Top Layer w0.254: DD6.11@109.988,35.687 108.712,35.687 107.925,36.474 107.925,52.644 108.849,53.569 115.316,53.569 115.7,53.185 DD8.6@115.7,51.965
NetDD6_12: DD6.12 DD8.7 | length 24.6
  Top Layer w0.254: v1(109.017,46.584) 108.433,45.999 108.433,37.236 108.712,36.957 DD6.12@109.988,36.957 ; v1(116.891,50.089) 116.97,50.168 DD8.7@116.97,51.965
  Bottom Layer w0.254: v1(109.017,46.584) 108.839,46.761 108.839,49.784 109.144,50.089 v1(116.891,50.089)
NetDD6_13: DD6.13 DD8.8 | length 46.4
  Top Layer w0.254: DD6.13@109.988,38.227 111.582,38.227 112.217,37.592 112.217,33.02 111.667,32.47 108.458,32.47 106.659,34.269 106.659,53.394 107.477,54.213 117.441,54.213 118.24,53.413 DD8.8@118.24,51.965
NetDD7_1: DD7.1 DD9.2 DD11.15 | length 66.4
  Top Layer w0.254: DD7.1@110.106,126.641 110.106,114.61 116.258,108.458 116.942,108.458 ; v1(116.688,110.973) 116.688,108.712 116.942,108.458 ; DD9.2@118.231,108.458 116.942,108.458 ; v1(143.332,117.188) 143.332,114.427 147.472,110.287 147.472,108.712 147.091,108.331 DD11.15@145.923,108.331
  Bottom Layer w0.254: v1(116.688,110.973) 122.903,117.188 v1(143.332,117.188)
NetDD7_2: DD7.2 DD9.11 | length 31.3
  Top Layer w0.254: DD7.2@111.376,126.641 111.376,120.628 123.927,108.077 123.927,104.419 124.968,103.378 DD9.11@127.381,103.378
NetDD7_3: DD7.3 DD9.12 | length 29
  Top Layer w0.254: DD7.3@112.646,126.641 112.646,120.755 124.824,108.577 124.824,105.656 125.832,104.648 DD9.12@127.381,104.648
NetDD7_4: DD7.4 DD9.13 | length 27.2
  Top Layer w0.254: DD7.4@113.916,126.641 113.916,125.143 113.817,125.044 113.817,122.758 125.328,111.248 125.328,106.574 125.984,105.918 DD9.13@127.381,105.918
NetDD7_11: DD7.11 R3.1 | length 64.4
  Top Layer w0.254: R3.1@70.355,153.448 71.317,153.448 71.857,152.908 71.857,149.784 90.893,130.747 118.152,130.747 118.996,131.591 DD7.11@118.996,135.741
NetDD7_12: DD7.12 R5.1 | length 58.4
  Top Layer w0.254: R5.1@75.181,153.448 75.362,153.448 75.362,148.819 92.9,131.281 116.927,131.281 117.726,132.08 DD7.12@117.726,135.741
NetDD7_13: DD7.13 R7.1 | length 52.9
  Top Layer w0.254: R7.1@79.88,153.448 80.943,153.448 83.363,151.028 83.363,143.688 95.148,131.902 115.262,131.902 116.456,133.096 DD7.13@116.456,135.741
NetDD7_14: DD7.14 R9.1 | length 44
  Top Layer w0.254: R9.1@84.706,153.448 84.684,153.448 84.684,148.488 100.305,132.867 113.84,132.867 115.186,134.214 DD7.14@115.186,135.741
NetDD7_15: DD7.15 R11.1 | length 46.8
  Top Layer w0.254: R11.1@89.532,153.448 91.671,153.448 91.761,153.539 91.761,155.351 94.322,157.912 109.302,157.912 109.626,157.587 109.626,147.625 113.916,143.335 DD7.15@113.916,135.741
NetDD7_16: DD7.16 R13.1 | length 33.8
  Top Layer w0.254: R13.1@94.612,153.448 98.432,153.448 99.289,154.305 107.188,154.305 107.823,153.67 107.823,147.244 112.646,142.421 DD7.16@112.646,135.741
NetDD7_17: DD7.17 R15.1 | length 30
  Top Layer w0.254: R15.1@100.327,153.448 100.85,153.448 100.85,137.326 104.064,134.112 111.122,134.112 111.376,134.366 DD7.17@111.376,135.741
NetDD7_18: DD7.18 R17.1 | length 19.5
  Top Layer w0.254: R17.1@105.915,153.448 105.893,153.448 105.893,144.018 110.106,139.805 DD7.18@110.106,135.741
NetDD8_1: DD8.1 DD10.2 DD12.15 | length 58.4
  Top Layer w0.254: DD8.1@109.35,51.965 109.35,49.505 v1(109.858,48.997) ; v1(117.069,44.298) 116.075,43.304 116.075,41.402 116.329,41.148 DD10.2@117.602,41.148 123.275,41.148 125.222,43.095 128.279,43.095 134.976,36.399 134.976,32.842 138.176,32.842 141.224,35.89 141.224,40.132 142.24,41.148 DD12.15@145.675,41.148
  Bottom Layer w0.254: v1(109.858,48.997) 112.37,48.997 v1(117.069,44.298)
NetDD8_2: DD8.2 DD10.11 | length 35.3
  Top Layer w0.254: DD8.2@110.62,51.965 110.62,50.259 110.87,50.009 110.87,48.617 114.563,44.924 114.563,38.932 115.045,38.451 115.045,32.114 115.328,31.83 120.701,31.83 124.939,36.068 DD10.11@126.752,36.068
NetDD8_3: DD8.3 DD10.12 | length 34.3
  Top Layer w0.254: DD8.3@111.89,51.965 111.89,49.444 115.067,46.267 115.067,39.918 115.549,39.436 115.549,32.61 115.824,32.334 120.294,32.334 125.298,37.338 DD10.12@126.752,37.338
NetDD8_4: DD8.4 DD10.13 | length 33.4
  Top Layer w0.254: DD8.4@113.16,51.965 113.16,50.295 115.571,47.884 115.571,40.422 116.053,39.94 116.053,32.842 118.903,32.842 124.668,38.608 DD10.13@126.752,38.608
NetDD8_11: DD8.11 R4.1 | length 60.2
  Top Layer w0.254: R4.1@72.393,78.264 73.152,78.264 73.889,79.001 v1(73.889,82.398) ; DD8.11@118.24,61.065 v1(118.24,64.11)
  Bottom Layer w0.254: v1(73.889,82.398) 92.177,64.11 v1(118.24,64.11)
NetDD8_12: DD8.12 R6.1 | length 65.6
  Top Layer w0.254: R6.1@75.838,78.137 75.152,78.137 74.803,78.486 74.803,80.772 75.133,81.102 76.733,81.102 77.572,80.264 77.572,70.739 91.897,56.413 115.824,56.413 116.97,57.559 DD8.12@116.97,61.065
NetDD8_13: DD8.13 R8.1 | length 50.5
  Top Layer w0.254: R8.1@79.632,78.137 80.772,78.137 81.382,77.527 81.382,72.238 96.215,57.404 114.176,57.404 115.7,58.928 DD8.13@115.7,61.065
NetDD8_14: DD8.14 R10.1 | length 45.3
  Top Layer w0.254: R10.1@83.569,78.137 84.48,78.137 92.685,69.933 92.685,63.983 98.755,57.912 113.414,57.912 114.43,58.928 DD8.14@114.43,61.065
NetDD8_15: DD8.15 R12.1 | length 37.9
  Top Layer w0.254: R12.1@88.268,78.137 88.925,78.137 97.104,69.958 97.104,65.38 103.911,58.572 112.725,58.572 113.16,59.007 DD8.15@113.16,61.065
NetDD8_16: DD8.16 R14.1 | length 31.4
  Top Layer w0.254: R14.1@93.221,78.01 94.463,78.01 100.965,71.508 100.965,65.38 106.909,59.436 111.636,59.436 111.89,59.69 DD8.16@111.89,61.065
NetDD8_17: DD8.17 R16.1 | length 27.3
  Top Layer w0.254: R16.1@97.793,78.01 99.72,78.01 100.577,78.867 104.369,78.867 107.925,75.311 107.925,70.053 110.62,67.358 DD8.17@110.62,61.065
NetDD8_18: DD8.18 R18.1 | length 19.7
  Top Layer w0.254: R18.1@102.492,77.883 102.489,77.883 102.489,68.58 109.35,61.719 DD8.18@109.35,61.065
NetDD11_2: DD11.2 DD13.5 DD15.15 | length 52.9
  Top Layer w0.254: DD11.2@136.773,108.331 v1(138.989,108.331) ; DD13.5@150.492,126.514 150.492,123.647 ; v1(152.095,121.437) 150.492,123.041 150.492,123.647 ; v1(159.128,115.011) 150.492,123.647 ; DD15.15@163.83,108.204 165.125,108.204 165.379,108.458 165.379,114.503 v1(164.871,115.011)
  Bottom Layer w0.254: v1(138.989,108.331) v1(152.095,121.437) ; v1(159.128,115.011) v1(164.871,115.011)
NetDD11_11: DD11.11 DD13.6 | length 37.1
  Top Layer w0.254: DD11.11@145.923,103.251 143.698,103.251 142.301,104.648 142.301,118.289 142.854,118.841 142.854,126.344 144.551,128.041 151.508,128.041 151.762,127.787 DD13.6@151.762,126.514
NetDD11_12: DD11.12 DD13.7 | length 29.9
  Top Layer w0.254: v1(143.866,104.521) DD11.12@145.923,104.521 ; DD13.7@153.032,126.514 153.032,125.022 v1(155.47,122.584)
  Bottom Layer w0.254: v1(143.866,104.521) 143.866,110.98 v1(155.47,122.584)
NetDD11_13: DD11.13 DD13.8 | length 54.2
  Top Layer w0.254: DD11.13@145.923,105.791 147.091,105.791 147.472,105.41 147.472,100.034 144.374,100.034 141.797,102.611 141.797,127.463 143.569,129.235 153.591,129.235 154.302,128.524 DD13.8@154.302,126.514
NetDD12_2: DD12.2 DD14.5 DD16.15 | length 64.5
  Top Layer w0.254: DD12.2@136.525,41.148 139.573,41.148 141.097,42.672 141.097,50.089 ; DD14.5@150.879,51.711 150.549,53.238 144.247,53.238 141.097,50.089 ; DD16.15@162.566,41.275 164.363,41.554 164.363,52.273 161.487,55.15 145.396,55.15 141.097,50.851 141.097,50.089
NetDD12_11: DD12.11 DD14.6 | length 20
  Top Layer w0.254: DD12.11@145.675,36.068 147.117,36.068 v1(147.549,36.5) ; v1(150.241,49.251) 151.616,49.251 152.149,49.784 DD14.6@152.149,51.711
  Bottom Layer w0.254: v1(147.549,36.5) 147.498,36.551 147.498,46.507 v1(150.241,49.251)
NetDD12_12: DD12.12 DD14.7 | length 35.2
  Top Layer w0.254: v1(144.297,31.801) 143.916,32.182 144.17,37.338 DD12.12@145.675,37.338 ; DD14.7@153.419,51.711 v1(153.419,53.746)
  Bottom Layer w0.254: v1(144.297,31.801) 144.297,45.048 152.996,53.746 v1(153.419,53.746)
NetDD12_13: DD12.13 DD14.8 | length 18.5
  Top Layer w0.254: DD12.13@145.675,38.608 v1(148.514,38.608) ; v1(154.689,47.219) DD14.8@154.689,51.711
  Bottom Layer w0.254: v1(148.514,38.608) 148.514,41.043 v1(154.689,47.219)
NetDD13_1: DD13.1 DD15.2 DD17.15 | length 60.7
  Top Layer w0.254: DD13.1@145.412,126.514 145.412,113.081 150.289,108.204 153.416,108.204 ; v1(152.4,111.43) 152.4,109.22 153.416,108.204 ; DD15.2@154.68,108.204 153.416,108.204 ; v1(179.959,111.43) 179.553,111.023 179.553,108.458 179.807,108.204 DD17.15@181.102,108.204
  Bottom Layer w0.254: v1(152.4,111.43) v1(179.959,111.43)
NetDD13_2: DD13.2 DD15.11 | length 33
  Top Layer w0.254: DD13.2@146.682,126.514 146.682,120.612 158.131,109.164 158.131,104.505 159.512,103.124 DD15.11@163.83,103.124
NetDD13_3: DD13.3 DD15.12 | length 30.1
  Top Layer w0.254: DD13.3@147.952,126.514 147.952,120.12 160.172,107.899 160.172,105.664 161.442,104.394 DD15.12@163.83,104.394
NetDD13_4: DD13.4 DD15.13 | length 27.8
  Top Layer w0.254: DD13.4@149.222,126.514 149.222,121.884 161.04,110.066 161.04,106.93 162.306,105.664 DD15.13@163.83,105.664
NetDD13_11: DD13.11 R19.1 | length 52.6
  Top Layer w0.254: R19.1@112.011,153.559 114.935,153.559 119.066,149.428 120.381,149.428 136.729,133.079 153.07,133.079 154.302,134.311 DD13.11@154.302,135.614
NetDD13_12: DD13.12 R21.1 | length 45.9
  Top Layer w0.254: R21.1@116.964,153.559 118.932,153.559 138.908,133.583 152.249,133.583 153.032,134.366 DD13.12@153.032,135.614
NetDD13_13: DD13.13 R23.1 | length 54.8
  Top Layer w0.254: R23.1@121.79,153.432 122.611,153.432 123.357,154.178 127.787,154.178 132.033,158.424 151.71,158.424 151.762,158.372 DD13.13@151.762,135.614
NetDD13_14: DD13.14 R25.1 | length 47.9
  Top Layer w0.254: R25.1@126.743,153.305 127.854,153.305 132.469,157.92 150.462,157.92 150.492,157.889 DD13.14@150.492,135.614
NetDD13_15: DD13.15 R27.1 | length 40.7
  Top Layer w0.254: R27.1@132.331,153.305 133.925,153.305 137.969,157.349 149,157.349 149.885,156.464 149.885,137.798 149.222,137.135 DD13.15@149.222,135.614
NetDD13_16: DD13.16 R29.1 | length 30.6
  Top Layer w0.254: R29.1@138.3,153.305 139.997,153.305 140.997,154.305 149.098,154.305 149.377,154.026 149.377,139.551 147.952,138.125 DD13.16@147.952,135.614
NetDD13_17: DD13.17 R31.1 | length 22.8
  Top Layer w0.254: R31.1@143.507,153.305 143.485,153.305 143.485,135.332 144.729,134.087 145.997,134.087 146.682,134.772 DD13.17@146.682,135.614
NetDD13_18: DD13.18 R33.1 | length 19
  Top Layer w0.254: DD13.18@145.412,135.614 145.412,144.599 148.158,147.345 148.158,153.305 R33.1@148.333,153.305
NetDD14_1: DD14.1 DD16.2 DD18.15 | length 57.2
  Top Layer w0.254: DD14.1@145.799,51.711 145.799,45.466 149.99,41.275 DD16.2@153.416,41.275 154.819,41.275 158.115,37.979 158.115,33.528 159.334,32.309 175.975,32.309 177.194,33.528 177.194,38.637 179.832,41.275 DD18.15@181.997,41.275
NetDD14_2: DD14.2 DD16.11 | length 24.1
  Top Layer w0.254: DD14.2@147.069,51.711 147.069,47.752 147.591,47.23 150.763,47.23 161.205,36.788 DD16.11@162.566,36.195
NetDD14_3: DD14.3 DD16.12 | length 22.1
  Top Layer w0.254: DD14.3@148.339,51.711 148.339,48.26 148.864,47.735 151.017,47.735 161.286,37.465 DD16.12@162.566,37.465
NetDD14_4: DD14.4 DD16.13 | length 21.2
  Top Layer w0.254: DD14.4@149.609,51.711 149.609,50.851 148.844,50.086 148.844,48.747 149.352,48.239 151.431,48.239 160.934,38.735 DD16.13@162.566,38.735
NetDD14_11: DD14.11 R20.1 | length 59.9
  Top Layer w0.254: R20.1@109.366,77.74 109.347,77.74 109.347,72.136 110.617,70.866 125.678,70.866 139.882,56.662 150.793,56.662 152.323,58.191 153.441,58.191 154.689,59.439 DD14.11@154.689,60.811
NetDD14_12: DD14.12 R22.1 | length 49.1
  Top Layer w0.254: R22.1@114.684,77.74 115.376,77.74 117.856,75.26 121.996,75.26 140.091,57.166 150.585,57.166 152.938,59.52 DD14.12@153.419,60.811
NetDD14_13: DD14.13 R24.1 | length 43.1
  Top Layer w0.254: R24.1@119.51,77.74 120.244,77.74 140.314,57.67 150.376,57.67 152.149,59.443 DD14.13@152.149,60.811
NetDD14_14: DD14.14 R26.1 | length 36.9
  Top Layer w0.254: R26.1@124.717,77.74 125.984,77.74 127.432,76.292 127.432,75.055 144.313,58.174 149.611,58.174 150.879,59.442 DD14.14@150.879,60.811
NetDD14_15: DD14.15 R28.1 | length 33.1
  Top Layer w0.254: R28.1@129.797,77.74 131.978,77.74 137.312,72.406 137.312,65.888 144.522,58.678 148.675,58.678 149.609,59.612 DD14.15@149.609,60.811
NetDD14_16: DD14.16 R30.1 | length 27.6
  Top Layer w0.254: R30.1@134.75,77.74 135.417,77.74 144.907,68.25 144.907,59.436 145.161,59.182 147.576,59.182 148.339,59.945 DD14.16@148.339,60.811
NetDD14_17: DD14.17 R32.1 | length 24.7
  Top Layer w0.254: R32.1@139.957,77.613 143.018,77.613 143.891,78.486 146.355,78.486 147.069,77.772 DD14.17@147.069,60.811
NetDD14_18: DD14.18 R34.1 | length 17.2
  Top Layer w0.254: R34.1@144.91,77.613 144.91,69.647 145.799,68.758 DD14.18@145.799,60.811
NetDD17_2: DD17.2 DD19.5 | length 26.6
  Top Layer w0.254: DD17.2@171.952,108.204 173.482,108.534 v1(173.482,114.554) ; v1(185.671,123.289) DD19.5@185.671,126.514
  Bottom Layer w0.254: v1(173.482,114.554) 176.936,114.554 v1(185.671,123.289)
NetDD17_11: DD17.11 DD19.6 | length 36.4
  Top Layer w0.254: DD17.11@181.102,103.124 182.651,103.124 183.159,103.632 183.159,119.278 179.908,122.53 179.908,128.041 186.611,128.041 186.941,127.711 DD19.6@186.941,126.514